# EAGLE board CT_schematic (EAGLE 7.6.0)

Size 100 x 80 mm. Coordinates in mm from the lower left corner, seen from the top.
Outline: 0,0 100,0 100,80 0,80 0,0
Copper layers (1*16): Top 0.035mm / dielectric 1.5mm / Bottom 0.035mm
Design rules "default": minimum track width 10mil, minimum drill 24mil, track to track 8mil, track to pad 8mil, pad to pad 8mil, via to via 8mil, smd to smd 8mil, copper to edge 40mil, drill to drill 8mil, minimum pad ring 10mil, minimum via ring 8mil, stop-mask expansion 4mil, vias tented up to drill 0mil, thermal gap 10mil

## Footprints (pad centres in the part's own frame; a part is rotated, then mirrored left to right if it is on the bottom)
C0603 = smd 0.8 x 0.8: 1 -0.762,0; 2 0.762,0
C0402 = smd 0.5 x 0.5: 1 -0.508,0; 2 0.508,0
C0805 = smd 1.2 x 1.3: 1 -1.016,0; 2 1.016,0
C1206 = smd 1.3 x 1.6: 1 -1.524,0; 2 1.524,0
L0603 = smd 0.8 x 0.8: 1 -0.762,0; 2 0.762,0
L0806 = smd 1.016 x 1.524: 1 -0.889,0; 2 0.889,0
R0603 = smd 0.8 x 0.8: 1 -0.762,0; 2 0.762,0
LQFP48 = smd 0.3 x 1.2: 1 -2.75,-4.25; 2 -2.25,-4.25; 3 -1.75,-4.25; 4 -1.25,-4.25; 5 -0.75,-4.25; 6 -0.25,-4.25; 7 0.25,-4.25; 8 0.75,-4.25; 9 1.25,-4.25; 10 1.75,-4.25; 11 2.25,-4.25; 12 2.75,-4.25; 25 2.75,4.25; 26 2.25,4.25; 27 1.75,4.25; 28 1.25,4.25; 29 0.75,4.25; 30 0.25,4.25; 31 -0.25,4.25; 32 -0.75,4.25; 33 -1.25,4.25; 34 -1.75,4.25; 35 -2.25,4.25; 36 -2.75,4.25 | smd 1.2 x 0.3: 13 4.25,-2.75; 14 4.25,-2.25; 15 4.25,-1.75; 16 4.25,-1.25; 17 4.25,-0.75; 18 4.25,-0.25; 19 4.25,0.25; 20 4.25,0.75; 21 4.25,1.25; 22 4.25,1.75; 23 4.25,2.25; 24 4.25,2.75; 37 -4.25,2.75; 38 -4.25,2.25; 39 -4.25,1.75; 40 -4.25,1.25; 41 -4.25,0.75; 42 -4.25,0.25; 43 -4.25,-0.25; 44 -4.25,-0.75; 45 -4.25,-1.25; 46 -4.25,-1.75; 47 -4.25,-2.25; 48 -4.25,-2.75
SAMTEC_FTSH-105-01-L-DV-K = smd 0.762 x 2.794: 1 -2.54,-2.032; 2 -2.54,2.032; 3 -1.27,-2.032; 4 -1.27,2.032; 5 0,-2.032; 6 0,2.032; 7 1.27,-2.032; 8 1.27,2.032; 9 2.54,-2.032; 10 2.54,2.032
FCI_10118193-0001LF = smd 0.4 x 1.35: 1 -1.3,2.675; 2 -0.65,2.675; 3 0,2.675; 4 0.65,2.675; 5 1.3,2.675 | smd 1.6 x 1.4: 6 -3.2,2.45; 7 3.2,2.45 | smd 1.9 x 1.9: 8 -1.2,0; 9 1.2,0 | hole 0.5: -3.3,0; 3.3,0
SOT143B = smd 1 x 0.7: 1 -0.75,-1 | smd 0.6 x 0.7: 2 0.95,-1; 3 0.95,1; 4 -0.95,1
XB24CZ7UIS-004 = smd 2.84 x 1.52: 1 -10,6; 2 -10,4; 3 -10,2; 4 -10,0; 5 -10,-2; 6 -10,-4; 7 -10,-6; 8 -10,-8; 9 -10,-10; 10 -10,-12; 11 -10,-14; 12 -10,-16; 13 -10,-18; 21 10,-18; 22 10,-16; 23 10,-14; 24 10,-12; 25 10,-10; 26 10,-8; 27 10,-6; 28 10,-4; 29 10,-2; 30 10,0; 31 10,2; 32 10,4; 33 10,6; 34 10,8; 35 10,10; 36 10,12; 37 10,14 | smd 1.52 x 2.84: 14 -6,-19.68; 15 -4,-19.68; 16 -2,-19.68; 17 0,-19.68; 18 2,-19.68; 19 4,-19.68; 20 6,-19.68
ABLS-25.000MHZ-B2F-T = smd 5.6 x 2.8: 1 -3.81,0; 2 5.69,0
ASEK = smd 1.4 x 1: 1 -1.1,-0.8; 2 1.1,-0.8; 3 1.1,0.8; 4 -1.1,0.8
TSOT-23-5 = smd 1.3 x 0.62: 1 -1.31,0.95; 2 -1.31,0; 3 -1.31,-0.95; 4 1.31,-0.95; 5 1.31,0.95
DFN8_2X3MC = smd 0.813 x 0.305: 1 -1.398,0.75; 2 -1.398,0.25; 3 -1.398,-0.25; 4 -1.398,-0.75; 5 1.398,-0.75; 6 1.398,-0.25; 7 1.398,0.25; 8 1.398,0.75 | smd 1.753 x 1.549: 9 0,0
JST-2-SMD = smd 1 x 4.6: 1 -1,-3.7; 2 1,-3.7 | smd 1.6 x 3.4: NC1 -3.4,1.5; NC2 3.4,1.5
SON-6 = smd 0.55 x 0.3: 1 -0.355,0.5 | smd 0.52 x 0.3: 2 -0.37,0; 3 -0.37,-0.5; 4 0.37,-0.5; 5 0.37,0; 6 0.37,0.5
SW_4-1437565-2 = smd 1.4 x 2.1: 1 -2.23,4.55; 2 -2.23,-4.55; 3 2.23,4.55; 4 2.23,-4.55
LGM67K-G1J2-24-Z = smd 0.8 x 1.4: A -2,0; C 0,0
NC7SZ125M5X = smd 1.3 x 0.7: 1 -1.3,0.95; 2 -1.3,0; 3 -1.3,-0.95; 4 1.3,-0.95; 5 1.3,0.95
DUMMY_PACKAGE_129 = drill 0.3: 1 0,-1; 2 1.5,-1; 3 3,-1

## Placement (x,y rotation side)
C1  1e-07  [C0603]  -19.05,73.66 0 top  (outside the outline)
C2  1e-07  [C0603]  -22.86,73.66 0 top  (outside the outline)
C3  1e-07  [C0603]  -26.67,73.66 0 top  (outside the outline)
C4  1e-07  [C0603]  -30.48,73.66 0 top  (outside the outline)
C5  4.7e-06  [C0603]  -69.85,68.58 0 top  (outside the outline)
C6  1e-07  [C0603]  -34.29,73.66 0 top  (outside the outline)
C7  1e-08  [C0603]  -38.1,73.66 0 top  (outside the outline)
C8  1e-06  [C0603]  -41.91,73.66 0 top  (outside the outline)
C9  1e-11  [C0402]  -24.13,78.74 0 top  (outside the outline)
C10  1e-11  [C0402]  -27.94,78.74 0 top  (outside the outline)
C11  1e-07  [C0402]  -31.75,78.74 0 top  (outside the outline)
C12  1e-05  [C0805]  -46.99,62.23 0 top  (outside the outline)
C13  1e-07  [C0402]  -35.56,78.74 0 top  (outside the outline)
C14  4.7e-11  [C0402]  -20.32,78.74 0 top  (outside the outline)
C15  8.2e-12  [C0603]  -15.24,73.66 0 top  (outside the outline)
C16  1e-08  [C0402]  -39.37,78.74 0 top  (outside the outline)
C17  1e-05  [C0805]  -52.07,62.23 0 top  (outside the outline)
C18  1e-05  [C0805]  -57.15,62.23 0 top  (outside the outline)
C19  1e-07  [C0402]  -43.18,78.74 0 top  (outside the outline)
C20  1e-05  [C1206]  -68.58,54.61 0 top  (outside the outline)
C21  1e-05  [C1206]  -16.51,62.23 0 top  (outside the outline)
C22  1e-08  [C0402]  -46.99,78.74 0 top  (outside the outline)
C23  1e-08  [C0402]  -50.8,78.74 0 top  (outside the outline)
C24  1e-08  [C0402]  -54.61,78.74 0 top  (outside the outline)
F1  240.0  [L0603]  -45.72,73.66 0 top  (outside the outline)
I1  3.3e-06  [L0806]  -22.86,62.23 0 top  (outside the outline)
R1  10000.0  [R0603]  -30.48,68.58 0 top  (outside the outline)
R2  1000.0  [R0603]  -49.53,73.66 0 top  (outside the outline)
R3  1600.5  [R0603]  -53.34,73.66 0 top  (outside the outline)
R4  4700.0  [R0603]  -57.15,73.66 0 top  (outside the outline)
R5  4700.0  [R0603]  -60.96,73.66 0 top  (outside the outline)
R6  10000.0  [R0603]  -35.56,68.58 0 top  (outside the outline)
R7  10000.0  [R0603]  -40.64,68.58 0 top  (outside the outline)
R8  10000.0  [R0603]  -45.72,68.58 0 top  (outside the outline)
R9  10000.0  [R0603]  -50.8,68.58 0 top  (outside the outline)
R10  5.0  [R0603]  -64.77,73.66 0 top  (outside the outline)
R11  220000.0  [R0603]  -15.24,68.58 0 top  (outside the outline)
R12  1000000.0  [R0603]  -69.85,62.23 0 top  (outside the outline)
R13  10000.0  [R0603]  -55.88,68.58 0 top  (outside the outline)
R14  10000.0  [R0603]  -60.96,68.58 0 top  (outside the outline)
R15  9100.0  [R0603]  -68.58,73.66 0 top  (outside the outline)
R16  680000.0  [R0603]  -20.32,68.58 0 top  (outside the outline)
R17  120000.0  [R0603]  -25.4,68.58 0 top  (outside the outline)
R18  2000.0  [R0603]  -15.24,78.74 0 top  (outside the outline)
R19  10000.0  [R0603]  -66.04,68.58 0 top  (outside the outline)
U1  STM32L152C6T6  [LQFP48]  -58.42,44.45 0 top  (outside the outline)
U2  FTSH-105-01-L-DV-K  [SAMTEC_FTSH-105-01-L-DV-K]  -62.23,7.62 0 top  (outside the outline)
U3  10118193-0001LF  [FCI_10118193-0001LF]  -68.58,43.18 0 top  (outside the outline)
U4  prtr5v0u2ax  [SOT143B]  -67.31,78.74 0 top  (outside the outline)
U5  XB24CZ7UIS-004  [XB24CZ7UIS-004]  -25.4,21.59 0 top  (outside the outline)
U6  ABLS-25.000MHZ-B2F-T  [ABLS-25.000MHZ-B2F-T]  -45.72,55.88 0 top  (outside the outline)
U7  ASEK-32.768KHz-ECST  [ASEK]  -29.21,55.88 0 top  (outside the outline)
U8  ltc3406es5  [TSOT-23-5]  -62.23,62.23 0 top  (outside the outline)
U9  MCP73831T-2ACI/MC  [DFN8_2X3MC]  -26.67,82.55 0 top  (outside the outline)
U10  S2B-PH-SM4-TB(LF)(SN)  [JST-2-SMD]  -41.91,45.72 0 top  (outside the outline)
U11  TPS3895ADRYR  [SON-6]  -20.32,82.55 0 top  (outside the outline)
U12  4-1437565-2  [SW_4-1437565-2]  -27.94,45.72 0 top  (outside the outline)
U13  Q65110A2395  [LGM67K-G1J2-24-Z]  -57.15,54.61 0 top  (outside the outline)
U14  nc7sz125m5x  [NC7SZ125M5X]  -27.94,62.23 0 top  (outside the outline)
U15  nc7sz125m5x  [NC7SZ125M5X]  -34.29,62.23 0 top  (outside the outline)
U16  nc7sz125m5x  [NC7SZ125M5X]  -40.64,62.23 0 top  (outside the outline)
U17  Dummy  [DUMMY_PACKAGE_129]  -17.78,83.82 0 top  (outside the outline)

## Library data of the parts
C1-C24 F1 I1 R1-R19 U1-U17 = circuit_tree

## Nets
CLK_CRYSTAL_U1_5: C9.1 U1.5 U6.1
CLK_CRYSTAL_U1_6: C10.1 U1.6 U6.2
CLK_U1_3: U1.3 U7.3
GND: C1.2 C2.2 C3.2 C4.2 C5.2 C6.2 C7.2 C8.2 C9.2 C10.2 C11.2 C12.2 C13.2 C14.2 C15.2 C16.2 C17.2 C18.1 C18.2 C19.2 C20.2 C21.2 C22.2 C23.2 C24.2 R2.2 R6.2 R10.2 R11.2 R15.2 R17.2 R18.2 U1.8 U1.23 U1.35 U1.47 U2.3 U2.5 U3.5 U3.6 U3.7 U3.8 U3.9 U4.1 U5.1 U5.11 U5.13 U5.22 U5.35 U7.2 U8.2 U9.6 U9.9 U10.2 U11.2 U13.C U14.2 U14.3 U15.1 U15.3 U16.1 U16.3 U17.1
INPUT_USBPOWER_5V: C20.1 R19.2 U3.1 U4.4 U9.1 U9.2
NET_U1_1: C6.1 U1.1
NET_U1_7: R5.1 U1.7 U16.4
NET_U1_9: C7.1 C8.1 F1.1 U1.9
NET_U1_44: R6.1 U1.44
NET_U1_45: R3.1 U1.45 U13.A
NET_U1_46: R1.1 U1.46 U12.3 U12.4
NET_U2_9: R10.1 U2.9
NET_U5_6: R4.1 U5.6 U15.4
NET_U8_1: U8.1
NET_U8_3: I1.1 U8.3
NET_U8_5: R11.1 R12.1 U8.5
NET_U8_ATNET_3: I1.2 R12.2
NET_U9_5: R19.1 U9.5
NET_U9_8: R18.1 U9.8
NET_U11_1: R14.1 R15.1 U11.1
NET_U11_3: R16.2 R17.1 U11.3
NET_U11_4: R13.1 U11.4 U14.4 U15.2 U16.2
NET_U12_1: R2.1 U12.1 U12.2
PROC_PC13_WKUP2: U1.2 U17.2
PROC_PC15_OSC32_OUT: U1.4 U17.3
PROC_SPI1_MISO: U1.16 U5.17
PROC_SPI1_MOSI: U1.17 U5.16
PROC_SPI1_NSS: U1.14 U5.15
PROC_SPI1_SCK: U1.15 U5.14
PROC_SYS_JTCK_SWCLK: R8.1 U1.37 U2.4
PROC_SYS_JTDO_TRACESWO: U1.39 U2.6
PROC_SYS_JTMS_SWDIO: R9.1 U1.34 U2.2
PROC_USB_DM: U1.32 U3.2 U4.3
PROC_USB_DP: U1.33 U3.3 U4.2
RST_OUT_U2_JTAG_RST_B: R7.1 U2.10 U14.1
VCC_S1_3V7: C17.1 C21.1 U8.4 U9.3 U9.4 U10.1
VCC_TIER1_3V3: C1.1 C2.1 C3.1 C4.1 C5.1 C11.1 C12.1 C13.1 C14.1 C15.1 C16.1 C18.2 C19.1 C22.1 C23.1 C24.1 F1.2 I1.2 R1.2 R3.2 R4.2 R5.2 R7.2 R8.2 R9.2 R12.2 R13.2 R14.2 R16.1 U1.24 U1.36 U1.48 U2.1 U5.2 U5.27 U7.4 U11.6 U14.5 U15.5 U16.5

## Tracks (layer width: path | path; a pad name or v marks a point on that pad's centre or on a via)
CLK_CRYSTAL_U1_5  (2 unrouted)
CLK_CRYSTAL_U1_6  (2 unrouted)
CLK_U1_3  (1 unrouted)
GND  (62 unrouted)
INPUT_USBPOWER_5V  (5 unrouted)
NET_U1_1  (1 unrouted)
NET_U1_7  (2 unrouted)
NET_U1_9  (3 unrouted)
NET_U1_44  (1 unrouted)
NET_U1_45  (2 unrouted)
NET_U1_46  (3 unrouted)
NET_U2_9  (1 unrouted)
NET_U5_6  (2 unrouted)
NET_U8_3  (1 unrouted)
NET_U8_5  (2 unrouted)
NET_U8_ATNET_3  (1 unrouted)
NET_U9_5  (1 unrouted)
NET_U9_8  (1 unrouted)
NET_U11_1  (2 unrouted)
NET_U11_3  (2 unrouted)
NET_U11_4  (4 unrouted)
NET_U12_1  (2 unrouted)
PROC_PC13_WKUP2  (1 unrouted)
PROC_PC15_OSC32_OUT  (1 unrouted)
PROC_SPI1_MISO  (1 unrouted)
PROC_SPI1_MOSI  (1 unrouted)
PROC_SPI1_NSS  (1 unrouted)
PROC_SPI1_SCK  (1 unrouted)
PROC_SYS_JTCK_SWCLK  (2 unrouted)
PROC_SYS_JTDO_TRACESWO  (1 unrouted)
PROC_SYS_JTMS_SWDIO  (2 unrouted)
PROC_USB_DM  (2 unrouted)
PROC_USB_DP  (2 unrouted)
RST_OUT_U2_JTAG_RST_B  (2 unrouted)
VCC_S1_3V7  (5 unrouted)
VCC_TIER1_3V3  (39 unrouted)